# Altium PCB LED.PcbDoc
Units mm, origin at the board's own origin, x right, y up, seen from the top; angles counter-clockwise.
Board outline 20 x 20 mm, 2 copper layers (Top Layer, Bottom Layer), stack 1.671 mm thick; 5 components, 4 nets, 10 pads, 1 vias.
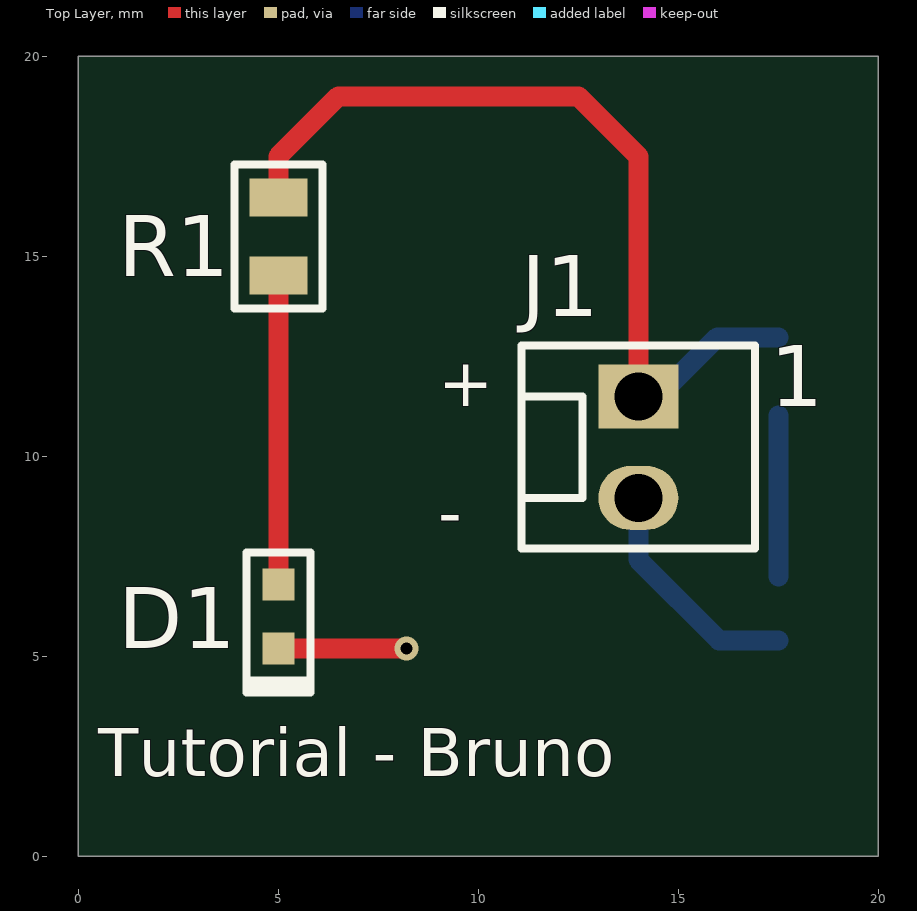
[diagram p0: Top Layer view]
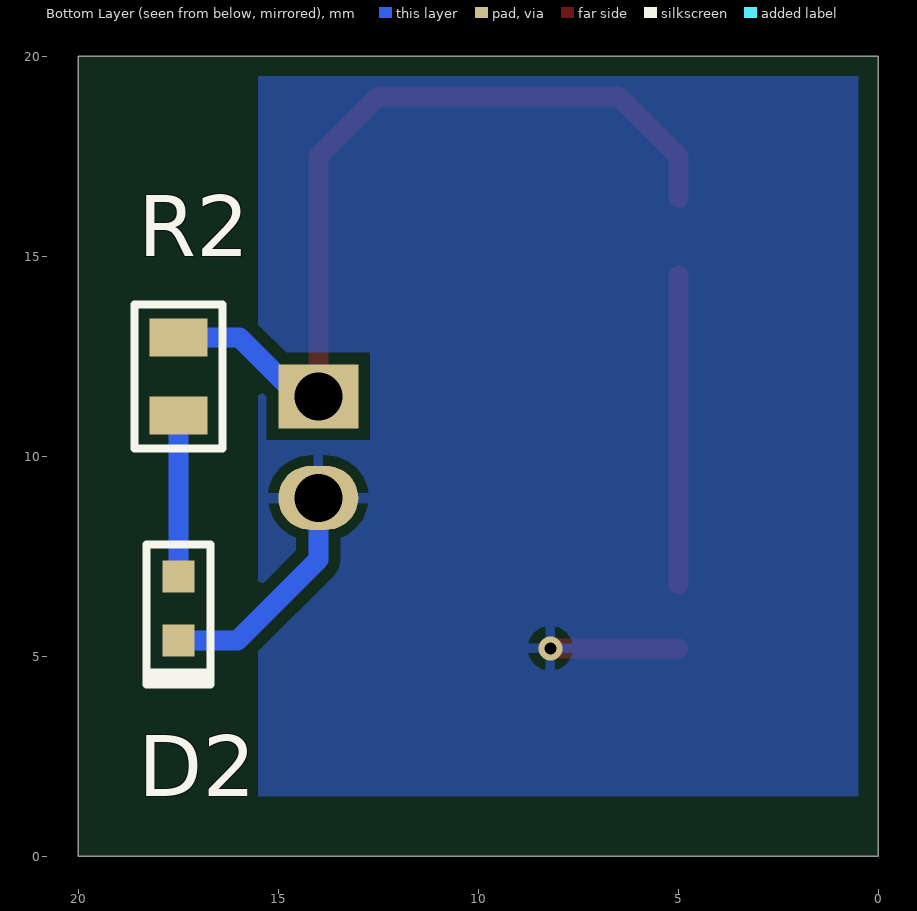
[diagram p1: Bottom Layer view, seen from below]
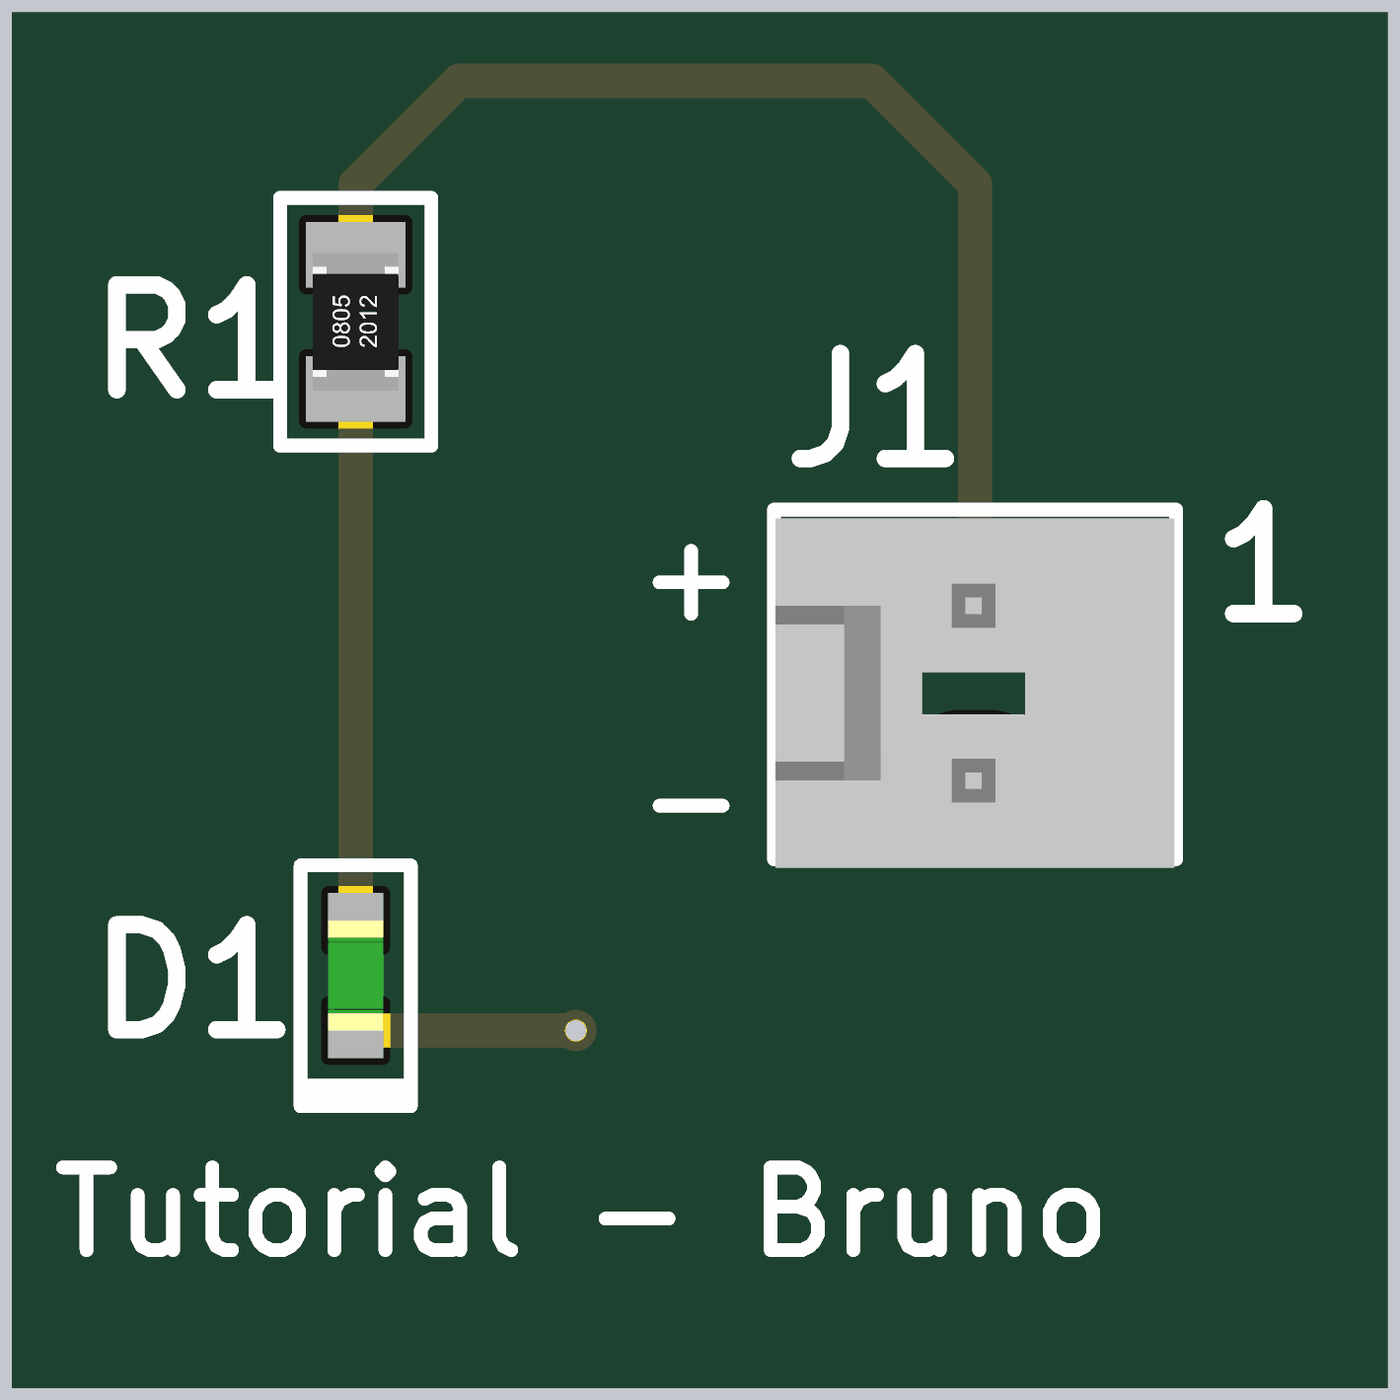
[diagram p2: 3D render of the assembled board from above, using the file's embedded part models]

## Layer stack, top to bottom
Top Solder: solder mask 0.0102, Solder Resist, Dk 3.5
Top Layer: signal copper 0.0356
Dielectric 1: dielectric 1.6, FR-4, Dk 4.8
Bottom Layer: signal copper 0.0356
Bottom Solder: solder mask 0.0102, Solder Resist, Dk 3.5

## Board outline
20,0 20,20 0,20 0,0

## Design rules (kind name [scope] priority, off if disabled: settings)
Clearance [All] p1: gap=0.3 ignorepadtopadclearanceinfootprint=FALSE
PolygonConnect [All] p1: connectstyle=Relief reliefconductorwidth=0.254 reliefentries=4 polygonreliefangle="90 Angle" airgapwidth=0.254
RoutingVias [All] p1: holewidth=0.3 width=0.6 viastyle="Through Hole" minholewidth=0.3 minwidth=0.6 maxholewidth=0.3 maxwidth=0.6
SilkToSolderMaskClearance [IsPad] p1: minsilkscreentomaskgap=0.1 clearancetoexposedcopper=TRUE
SolderMaskExpansion [All] p1: expansion=0.102
Width [All] p1: maxlimit=1 minlimit=0.3 preferedwidth=0.5
29 further rules are at their usual default settings.

## Components (designator, comment, footprint, x,y, rotation, side; value= is the part's Value field where it differs from the comment)
D1 "GREEN" "LED_LNJ626 GREEN" 5,6 r90 top
D2 "GREEN" "LED_LNJ626 GREEN" 17.5,6.2 r90 bottom
J1 "1x2 Header" HDR1X2 14,11.5 r0 top
R1 "360R" R_CRCW0805 5,15.5 r90 top
R2 "360R" R_CRCW0805 17.5,12 r90 bottom

## Footprints (in the part's own frame and the unit in brackets; to place one, negate y for a bottom-side part, rotate by r counter-clockwise, add the part's x,y. Pads: shape width x height; smd on the part's side, far side on the other; paste and mask are expansions set on the pad)
HDR1X2 [mm]
  rect 2x1.6 hole 1.2: 1(0,0)
  oval 2x1.6 hole 1.2: 2(0,-2.54)
  silkscreen extent -2.92,-3.81 2.92,1.27, body extent -2.9,-3.94 2.9,1.14, height 11.71
"LED_LNJ626 GREEN" [mm]
  rect 0.8x0.8 smd: 1(-0.8,0) 2(0.8,0)
  silkscreen extent -1.9,-0.8 1.6,0.8, body extent -0.8,-0.4 0.8,0.4, height 0.4
R_CRCW0805 [mm]
  rect 0.95x1.45 smd: 1(-0.975,0) 2(0.975,0)
  silkscreen extent -1.8,-1.1 1.8,1.1, body extent -1,-0.62 1,0.63, height 0.45

## Part data
D1 D2: library part LNJ626W8CRA, "PANASONIC - LNJ626W8CRA - LED, REINGRÜN, HIGH-BRIGHTNESS, 0603", Case/Package=0603, Case Code (Metric)=1608, Color=Green, Forward Current=5mA, Forward Voltage=2.9V, Manufacturer="Panasonic SSG", Max Operating Temperature=85°C, Min Operating Temperature=-30°C, Package Quantity=5000, Reverse Voltage=5V, Supplier Part Number 1=P13497CT-ND, Case Code (Imperial)=0603, Category=Optoelectronics, ComponentLink1Description=http://www.mouser.com/ds/2/315/LNJ626W8CRA_CEK-226053.pdf?src-supplier=Mouser, ComponentLink1URL=http://www.mouser.com/ds/2/315/LNJ626W8CRA_CEK-226053.pdf?src-supplier=Mouser, ComponentLink2Description=http://www.farnell.com/datasheets/1512070.pdf?src-supplier=Element14, ComponentLink2URL=http://www.farnell.com/datasheets/1512070.pdf?src-supplier=Element14, Dominant Wavelength=527nm, Height=0.43mm, Illumination Color=Green, Lead Free="Lead Free", Length=1.6mm, Lens Style=Rectangular, Luminous Intensity=40mcd, Manufacturer Part Number=LNJ626W8CRA, Mount="Surface Mount", Number of LEDs=1, Number of Pins=2, Packaging="Tape and Reel", REACH SVHC=Yes, Stock 1=0, Supplier 1=Digi-Key, Test Current=5mA, Wavelength=527nm, Width=0.8mm
J1: library part 22-29-2021, "Conn Wire to Board HDR 2 POS 2.54mm Solder ST Thru-Hole Bag", Color=White, Flammability Rating="UL94 V-0", Insulation Color=Natural, Manufacturer=Molex, Max Operating Temperature=80°C, Supplier Part Number 1=91C4367, Voltage Rating (DC)=250V, Category=Connectors, ComponentLink1Description=https://www.molex.com/pdm_docs/sd/022292021_sd.pdf?src-supplier=Digi-Key, ComponentLink1URL=https://www.molex.com/pdm_docs/sd/022292021_sd.pdf?src-supplier=Digi-Key, Connector Type="Header,Male Pin", Contact Material=Brass, Contact Mating Length=0.295inch, Contact Plating=Gold, Contact Post Length=0.14inch, Contact Shape=Square, Fastening Type=Friction, Gender=Male, Glow Wire Compliant=Non-compliant, Halogen Free="Low Halogen", Insulation Height=0.461inch, Insulation Material=Nylon, Lead Free="Lead Free", Manufacturer Part Number=22-29-2021, Mount="Through Hole", Number of Positions=2, Number of Rows=1, Packaging=Bag, Stock 1=0, Supplier 1=Newark, Termination=Solder
R1 R2: library part CRCW08053R60FNEA, "RES SMD 3.6 OHM 1% 1/8W 0805", Case/Package=0805, Case Code (Metric)=2012, Manufacturer="Vishay Dale", Max Operating Temperature=155°C, Max Power Dissipation=125mW, Min Operating Temperature=-55°C, Package Quantity=5000, Resistance=3.6R, Supplier Part Number 1=541-3.60CCT-ND, Temperature Coefficient=200ppm/°C, Tolerance=1%, Voltage Rating (DC)=150V, Case Code (Imperial)=0805, Category=Resistors, ComponentLink1Description=http://www.vishay.com/docs/20035/dcrcwe3.pdf?src-supplier=Digi-Key, ComponentLink1URL=http://www.vishay.com/docs/20035/dcrcwe3.pdf?src-supplier=Digi-Key, Composition="Thick Film", Contact Plating=Tin, Features="Automotive AEC-Q200", Height=0.02inch, Lead Free="Lead Free", Length=0.079inch, Manufacturer Part Number=CRCW08053R60FNEA, Number of Terminations=2, Packaging="Tape and Reel", Radiation Hardening=No, Stock 1=0, Supplier 1=Digi-Key, Width=0.049inch

## Via types
v1: diameter 0.6, hole 0.3, Top Layer to Bottom Layer, tented top, 1 vias

## Nets (pads, with @x,y where several pads share a name; then routed paths per layer and width w, separated by ;. In a path a pad name is that pad's centre, name@x,y a point inside that pad or via, vN(x,y) a via of type N, cw(c..) or ccw(c..) an arc to the next point about the centre after c; other vN are vias at no path point)
+3V3: J1.1 R1.2 R2.2 | length 21.4
  Top Layer w0.5: R1.2 5,17.5 6.5,19 12.5,19 14,17.5 J1.1
  Bottom Layer w0.5: J1.1 14.5,11.5 15.975,12.975 R2.2
DIODE1: D1.2 R1.1 | length 7.7
  Top Layer w0.5: D1.2 R1.1
DIODE2: D2.2 R2.1 | length 4
  Bottom Layer w0.5: D2.2 R2.1
GND: D1.1 D2.1 J1.2 | length 9.1
  Top Layer w0.5: D1.1 v1(8.2,5.2)
  Bottom Layer w0.5: J1.2 14,7.416 16.016,5.4 D2.1

## Polygon pours and split planes (outlines as drawn)
GND on Bottom Layer (solid, pour order 0): 1.5,1.5 15.5,1.5 15.5,19.5 1.5,19.5
GND on Bottom Layer (solid, pour order 14): 1,11.5
GND on Bottom Layer (solid, pour order 12): -4,18.5
GND on Bottom Layer (solid, pour order 10): -4,18.5
GND on Bottom Layer (solid, pour order 8): 1.5,19.5 1.5,1.5 0.5,1.5 0.5,19.5
GND on Bottom Layer (solid, pour order 6): 1.5,13
GND on Bottom Layer (solid, pour order 4): -2.5,10.5
GND on Bottom Layer (solid, pour order 2): -5,9

## Silkscreen, mask and mechanical layers (free items; w line width, h text height)
Top Overlay:
  text "+" at 9,11.246 h1.2
  text "-" at 9,8 h1.2
  text "Tutorial - Bruno" at 0.5,2 h1.2
Board Outline:
  the board outline again, w0.1

## Text inside footprints (layer, text, board x,y; h text height)
J1: Top Overlay "1" at 17.302,11.246 h1.52